# Altium PCB SIM_PCB.PcbDoc
Units mil, origin at the board's own origin, x right, y up, seen from the top; angles counter-clockwise.
Board outline 6000 x 4000 mil, 2 copper layers (Top Layer, Bottom Layer); 17 components, 19 nets, 158 pads, 0 vias.
Unrouted connection lines stored in the file: 66.
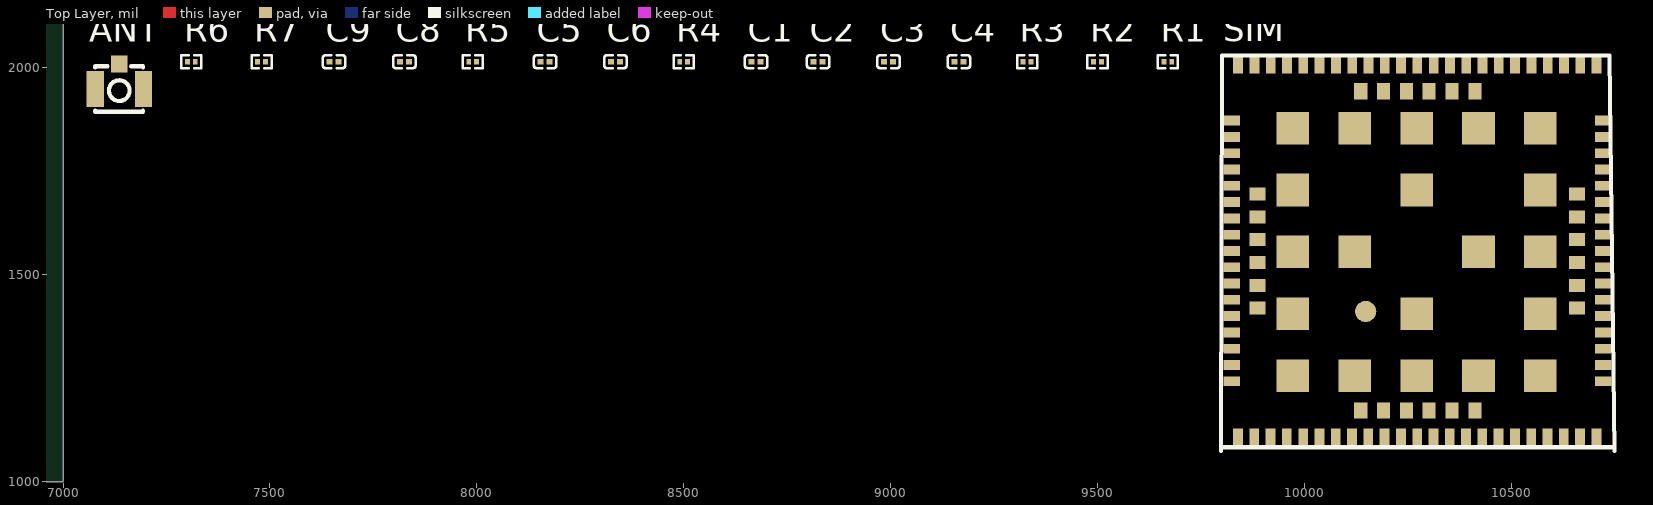
[diagram p0: Top Layer view]
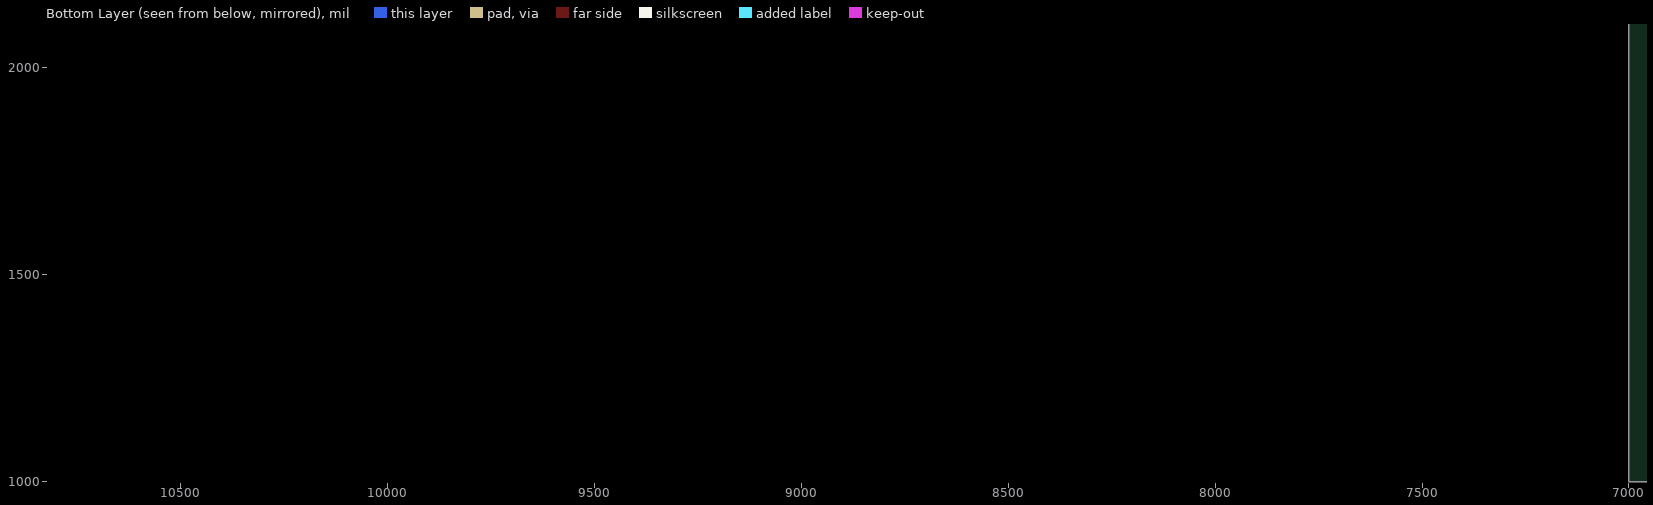
[diagram p1: Bottom Layer view, seen from below]

## Layer stack, top to bottom
Top Solder: solder mask 0.4, Solder Resist, Dk 3.5
Top Layer: signal copper 1.4
Dielectric 1: dielectric 12.6, FR-4, Dk 4.8
Bottom Layer: signal copper 1.4
Bottom Solder: solder mask 0.4, Solder Resist, Dk 3.5

## Board outline
1000,1000 7000,1000 7000,5000 1000,5000

## Design rules (kind name [scope] priority, off if disabled: settings)
Clearance [All] p1: gap=10 ignorepadtopadclearanceinfootprint=FALSE except(0: Arc-Hole Track-Hole SMDPad-Hole THPad-Hole Via-Hole Fill-Hole Poly-Hole Region-Hole Text-Hole)
PolygonConnect [All] p1: connectstyle=Relief reliefconductorwidth=10 reliefentries=4 polygonreliefangle="90 Angle" airgapwidth=10
RoutingVias [All] p1: holewidth=28 width=50 viastyle="Through Hole" minholewidth=28 minwidth=50 maxholewidth=28 maxwidth=50
SolderMaskExpansion [All] p1: expansion=4 istentingtop=FALSE
Width [All] p1: maxlimit=10 minlimit=10 preferedwidth=10
30 further rules are at their usual default settings.

## Components (designator, comment, footprint, x,y, rotation, side; value= is the part's Value field where it differs from the comment)
ANT "ANT" "CONNECTORS RF SMD TYPE IPEX" 7135,1945 r0 top
C1 "10pF" C0201 8675,2015 r0 top
C2 "33pF" C0201 8825,2015 r0 top
C3 "0.1uF" C0201 8995,2015 r0 top
C4 "1uF" C0201 9165,2015 r0 top
C5 "33pF" C0201 8165,2015 r0 top
C6 "100nF" C0201 8335,2015 r0 top
C8 "22pF" C0201 7825,2015 r0 top
C9 "22pF" C0201 7655,2015 r0 top
R1 "4.7k" R0201 9670,2015 r0 top
R2 "47k" R0201 9500,2015 r0 top
R3 "4.7k" R0201 9330,2015 r0 top
R4 "47k" R0201 8500,2015 r0 top
R5 "22R" R0201 7990,2015 r0 top
R6 "22R" R0201 7310,2015 r0 top
R7 "22R" R0201 7480,2015 r0 top
SIM "Sim7670G" PCBComponent_1 10100,1310 r0 top

## Footprints (in the part's own frame and the unit in brackets; to place one, negate y for a bottom-side part, rotate by r counter-clockwise, add the part's x,y. Pads: shape width x height; smd on the part's side, far side on the other; paste and mask are expansions set on the pad)
C0201 [mil]
  rect 14.51x12.76 smd paste-3937.01 mask+2: 1(-10.8,0) 2(10.8,0)
  silkscreen extent -27,-15 27,15
"CONNECTORS RF SMD TYPE IPEX" [mm]
  rect 1x1.05 smd: 1(0.024,1.627)
  rect 1.05x2.2 smd: 2(-1.451,0.102) 3(1.499,0.102)
  silkscreen extent -1.45,-1.3 1.47,1.5, body extent -1.45,-1.4 1.55,1.7, height 1.25
PCBComponent_1 [mm]
  rect 1x0.6 smd: 1(-6.998,14.29) 2(-6.998,13.29) 3(-6.998,12.29) 4(-6.998,11.29) 5(-6.998,10.29) 6(-6.998,9.29) 7(-6.998,8.29) 8(-6.998,7.29) 9(-6.998,6.29) 10(-6.998,5.29) 11(-6.998,4.29) 12(-6.998,3.29) 13(-6.998,2.29) 14(-6.998,1.29) 15(-6.998,0.29) 16(-6.998,-0.71) 17(-6.998,-1.71) 35(15.8,-1.71) 36(15.8,-0.71) 37(15.8,0.29) 38(15.8,1.29) 39(15.8,2.29) 40(15.8,3.29) 41(15.8,4.29) 42(15.8,5.29) 43(15.8,6.29) 44(15.8,7.29) 45(15.8,8.29) 46(15.8,9.29) 47(15.8,10.29) 48(15.8,11.29) 49(15.8,12.29) 50(15.8,13.29) 51(15.8,14.29)
  rect 0.6x1 smd: 18(-3.615,-5.118) 19(-2.615,-5.118) 20(-1.615,-5.118) 21(-0.615,-5.118) 22(0.385,-5.118) 23(1.385,-5.118) 24(2.385,-5.118) 25(3.385,-5.118) 26(4.385,-5.118) 27(5.385,-5.118) 28(6.385,-5.118) 29(7.385,-5.118) 30(8.385,-5.118) 31(9.385,-5.118) 32(10.385,-5.118) 33(11.385,-5.118) 34(12.385,-5.118) 52(12.396,17.693) 53(11.396,17.693) 54(10.396,17.693) 55(9.396,17.693) 56(8.396,17.693) 57(7.396,17.693) 58(6.396,17.693) 59(5.396,17.693) 60(4.396,17.693) 61(3.396,17.693) 62(2.396,17.693) 63(1.396,17.693) 64(0.396,17.693) 65(-0.604,17.693) 66(-1.604,17.693) 67(-2.604,17.693) 68(-3.604,17.693) 89(-6.615,-5.118) 90(-5.615,-5.118) 91(-4.615,-5.118) 92(13.385,-5.118) 93(14.385,-5.118) 94(15.385,-5.118) 95(15.396,17.693) 96(14.396,17.693) 97(13.396,17.693) 98(-4.604,17.693) 99(-5.604,17.693) 100(-6.615,17.692)
  rect 2x2 smd: 69(-3.25,13.83) 70(-3.25,10.03) 71(-3.25,6.23) 72(-3.25,2.43) 73(-3.25,-1.37) 74(0.55,-1.37) 75(4.35,-1.37) 76(8.15,-1.37) 77(11.95,-1.37) 78(11.95,2.43) 79(11.95,6.23) 80(11.95,10.03) 82(8.15,13.83) 83(4.35,13.83) 83(11.95,13.83) 84(0.55,13.83) 85(0.55,6.23) 86(4.35,2.43) 87(8.15,6.23) 88(4.35,10.03)
  rect 1x0.8 smd: 101(-5.423,9.781) 102(-5.423,8.381) 103(-5.423,6.981) 104(-5.423,5.581) 105(-5.423,4.181) 106(-5.423,2.781) 113(14.2,2.78) 114(14.2,4.18) 115(14.2,5.58) 116(14.2,6.98) 117(14.2,8.38) 118(14.2,9.78)
  rect 0.8x1 smd: 107(0.92,-3.51) 108(2.32,-3.51) 109(3.72,-3.51) 110(5.12,-3.51) 111(6.52,-3.51) 112(7.92,-3.51) 119(7.92,16.09) 120(6.52,16.09) 121(5.12,16.09) 122(3.72,16.09) 123(2.32,16.09) 124(0.92,16.09)
  round 1.3 smd: ""(1.224,2.575)
  silkscreen extent -7.65,-5.99 16.51,18.28
R0201 [mil]
  rect 11.93x12.76 smd paste-3937.01 mask+2: 1(-9.51,0) 2(9.51,0)
  silkscreen extent -24,-15 24,15

## Part data
ANT: library part "CONNECTORS RF SMD", "SMD RF Connectors / Coaxial Connectors ROHS", BOM_JLCPCB Part Class="Extended Part", BOM_Manufacturer="SHOU HAN(首韩)", BOM_Manufacturer Part="IPEX1-TXZ 142", BOM_Supplier=LCSC, BOM_Supplier Part=C3151745, Contributor=lcsc, link=https://atta.szlcsc.com/upload/public/pdf/source/20220627/A0C2EF411B6F3EC53ED1A4F491E26EB6.pdf, spicePre=U, spiceSymbolName="IPEX1-TXZ 142"
C1 C2 C3 C4 C5 C6 C8 C9: library part CAP104-100nF-50V, "Capacitor", 104=100nF
R1 R2 R3 R4 R5 R6 R7: library part "RES 0603 1%_", "±1% - Chip Resistor - Surface Mount ROHS", Chung_Loai=Dán, Don_Vi=Con, Ma_Hang=MH005880, So_Chan=2

## Nets (pads, with @x,y where several pads share a name; then routed paths per layer and width w, separated by ;. In a path a pad name is that pad's centre, name@x,y a point inside that pad or via, vN(x,y) a via of type N, cw(c..) or ccw(c..) an arc to the next point about the centre after c; other vN are vias at no path point)
ANT: ANT.1 SIM.60
GND: ANT.2 ANT.3 C1.1 C2.1 C3.1 C4.1 C5.1 C6.1 C8.2 C9.2 R2.1 R4.1 SIM.2 SIM.17 SIM.18 SIM.29 SIM.39 SIM.45 SIM.46 SIM.54 SIM.58 SIM.59 SIM.61 SIM.62 SIM.63 SIM.64 SIM.65 SIM.69 SIM.70 SIM.71 SIM.72 SIM.73 SIM.74 SIM.75 SIM.76 SIM.77 SIM.78 SIM.79 SIM.80 SIM.82 SIM.83 SIM.84 SIM.85 SIM.86 SIM.87 SIM.88 SIM.89 SIM.91 SIM.92 SIM.94
IO27_GSM_PWRKEY: R1.2
M2M_RXD: SIM.10
M2M_TXD: SIM.9
NetC7_1: R5.2 SIM.31
NetC8_1: C8.1 R7.2 SIM.33
NetC9_1: C9.1 R6.2 SIM.32
NetQ1_1: R1.1 R2.2
NetQ2_1: R3.1 R4.2
PWRKEY: SIM.1
RESET_SIM: SIM.16
Sim_CLK: R6.1
Sim_DATA: R5.1
Sim_RST: R7.1
Sim_VSIM: C5.2 C6.2 SIM.30
VBAT: C1.2 C2.2 C3.2 C4.2 SIM.55 SIM.56 SIM.57
VCC5V: 
xb_Reset: R3.2
pads on no net: SIM. SIM.3 SIM.4 SIM.5 SIM.6 SIM.7 SIM.8 SIM.11 SIM.12 SIM.13 SIM.14 SIM.15 SIM.19 SIM.20 SIM.21 SIM.22 SIM.23 SIM.24 SIM.25 SIM.26 SIM.27 SIM.28 SIM.34 SIM.35 SIM.36 SIM.37 SIM.38 SIM.40 SIM.41 SIM.42 SIM.43 SIM.44 SIM.47 SIM.48 SIM.49 SIM.50 SIM.51 SIM.52 SIM.53 SIM.66 SIM.67 SIM.68 SIM.90 SIM.93 SIM.95 SIM.96 SIM.97 SIM.98 SIM.99 SIM.100 SIM.101 SIM.102 SIM.103 SIM.104 SIM.105 SIM.106 SIM.107 SIM.108 SIM.109 SIM.110 SIM.111 SIM.112 SIM.113 SIM.114 SIM.115 SIM.116 SIM.117 SIM.118 SIM.119 SIM.120 SIM.121 SIM.122 SIM.123 SIM.124